# Altium PCB charger.PcbDoc (part 2 of 2)
Units mil, origin at the board's own origin, x right, y up, seen from the top; angles counter-clockwise.
Board outline 4340.74 x 2765.92 mil, 2 copper layers (Top Layer, Bottom Layer); 142 components, 73 nets, 399 pads, 1053 vias.
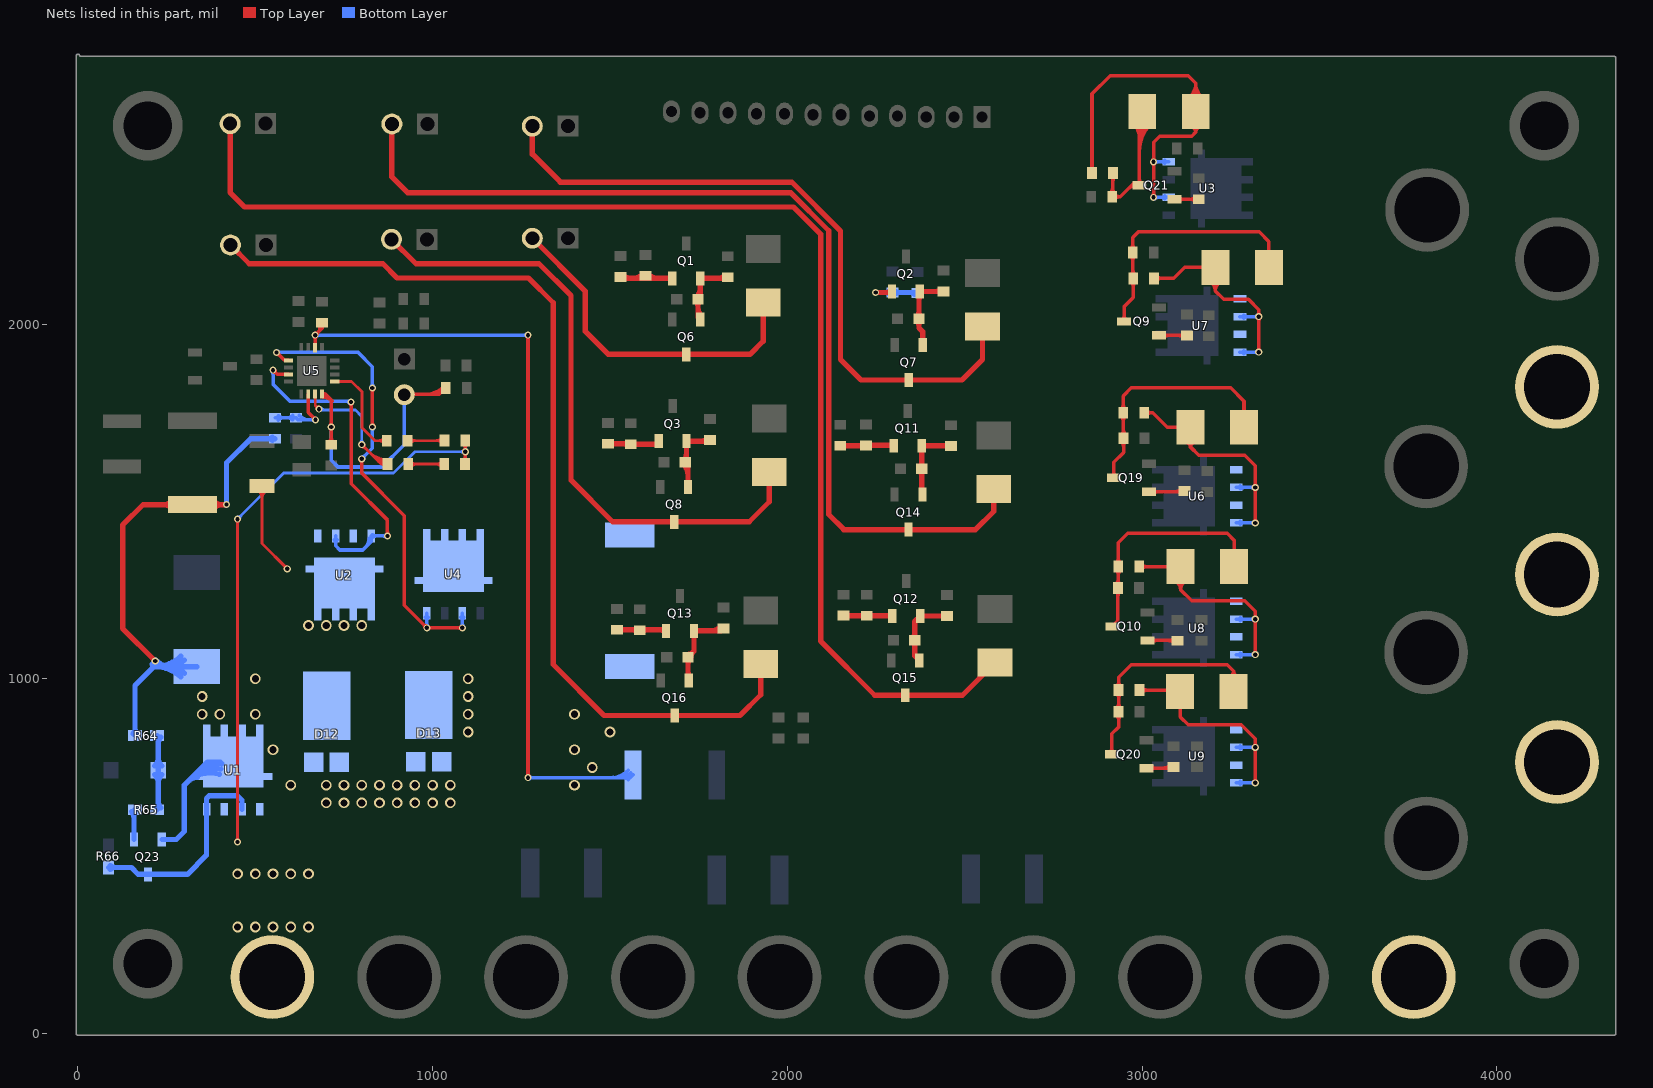
[diagram p2: the nets of this part, all layers, seen from the top]

## Via types
v1: diameter 30, hole 20, Top Layer to Bottom Layer, tented both sides, 995 vias
v2: diameter 20, hole 12, Top Layer to Bottom Layer, tented both sides, 57 vias
v3: diameter 55, hole 40, Top Layer to Bottom Layer, tented both sides, 1 vias

## Nets (pads, with @x,y where several pads share a name; then routed paths per layer and width w, separated by ;. In a path a pad name is that pad's centre, name@x,y a point inside that pad or via, vN(x,y) a via of type N, cw(c..) or ccw(c..) an arc to the next point about the centre after c; other vN are vias at no path point) (continued)
NetC12_2: C12.2 L2.2 R70.1 U5.10 | length 2529.7
  Top Layer w10: v2@665.3,1965.3 cw(c656.77,1956.77) 668.84,1956.77 cw(c680.91,1956.77) v2@672.38,1965.3 ; U5.10@668.84,1933.26 v2(668.84,1968.84) 688,1988 ; v2@668.84,1973.84 ccw(c668.84,1985.91) 677.38,1977.38 ccw(c685.91,1968.84) v2@673.84,1968.84 ; 678.29,1978.29 ccw(c668.28,1988.3) C12.2@678.63,1997.95 ; C12.2@683.31,1996.53 cw(c677.91,1988) 688,1988 ; 685.61,1985.61 ccw(c675.85,1995.36) C12.2@685.94,2004.78 ; C12.2@688,2003.94 688,1988 ; C12.2@692.69,1996.53 ccw(c698.09,1988) 688,1988 ; v2@1265.3,724.7 ccw(c1256.77,733.23) 1268.84,733.23 ccw(c1280.91,733.23) v2@1272.38,724.7 ; v2@1265.3,1965.3 cw(c1256.77,1956.77) 1268.84,1956.77 cw(c1280.91,1956.77) v2@1272.38,1965.3 ; v2(1268.84,721.16) v2(1268.84,1968.84)
  Bottom Layer w10: v2(668.84,1968.84) v2(1268.84,1968.84) ; v2@672.38,1965.3 cw(c680.91,1956.77) 680.91,1968.84 cw(c680.91,1980.91) v2@672.38,1972.38 ; v2@1265.3,1965.3 ccw(c1256.77,1956.77) 1256.77,1968.84 ccw(c1256.77,1980.91) v2@1265.3,1972.38 ; v2(1268.84,721.16) 1557.16,721.16 R70.1@1565,729 ; v2@1272.38,717.62 cw(c1280.91,709.09) 1280.91,721.16 cw(c1280.91,733.23) v2@1272.38,724.7 ; 1501.12,721.16 ccw(c1501.12,792.88) R70.1@1551.83,742.17 ; 1525.26,721.16 ccw(c1525.26,768.74) R70.1@1558.9,735.1 ; 1538.97,721.16 cw(c1538.97,702.97) R70.1@1551.83,715.83
  other v1: 1400,700 1450,750 1400,800 1500,850 1400,900
NetD1_1: cooler1.2 D1.1 Q6.3 | length 976.9
  Top Layer w15: cooler1.2@1281,2242 1430,2093 1430,1980 1495.43,1914.57 Q6.3@1714.63,1914.57 1894.57,1914.57 1932,1952 D1.1@1932,2060.61
NetD2_1: cooler2.2 D2.1 Q7.3 | length 1941.4
  Top Layer w15: cooler2.2@1281,2558 1281,2479 1360,2400 2012.53,2400 2150,2262.53 2150,1900 2207.43,1842.57 Q7.3@2342.63,1842.57 2492.57,1842.57 2550,1900 D2.1@2550,1993.61
NetD3_1: D3.1 P3.2 Q8.3 | length 1846.5
  Top Layer w15: P3.2@884,2239 953,2170 1300,2170 1390,2080 1390,1960 ; 1390,2000 1390,1960 ; D3.1@1949,1582.61 1949,1499 1892.57,1442.57 Q8.3@1680.63,1442.57 1507.43,1442.57 1390,1560 1390,1960
NetD4_1: D4.1 R6.2 U7.2 U7.4 | length 903.8
  Top Layer w10: R6.2@3034.06,2129 3089,2129 3120,2160 D4.1@3206.61,2160 3206.61,2093.39 ; R6.2@3040.26,2122.79 cw(c3055.25,2107.8) 3055.25,2129 cw(c3055.25,2150.2) R6.2@3040.26,2135.21 ; D4.1@3190.68,2119.7 cw(c3176.92,2093.4) 3206.61,2093.4 ; D4.1@3195.31,2128.56 cw(c3185.56,2109.91) 3206.61,2109.91 cw(c3227.65,2109.91) D4.1@3217.9,2128.56 ; D4.1@3222.53,2119.7 ccw(c3236.29,2093.4) 3206.61,2093.4 ; v2@3325.63,1924.37 ccw(c3317.1,1932.9) 3329.17,1932.9 ccw(c3341.24,1932.9) v2@3332.7,1924.37 ; v2@3325.63,2017.3 cw(c3317.1,2008.76) 3329.17,2008.76 cw(c3341.24,2008.76) v2@3332.7,2017.3 ; v2@3325.63,2024.37 ccw(c3317.1,2032.9) 3329.17,2032.9 ccw(c3341.24,2032.9) v2@3332.7,2024.37 ; v2(3329.17,1920.83) v2(3329.17,2020.83) 3329.17,2040.83 3300,2070 3230,2070 3206.61,2093.39
  Bottom Layer w10: U7.4@3276.09,1920.83 v2(3329.17,1920.83) ; U7.2@3276.09,2020.83 v2(3329.17,2020.83) ; U7.4@3287.16,1916.85 cw(c3296.77,1907.24) 3296.77,1920.83 cw(c3296.77,1934.42) U7.4@3287.16,1924.81 ; U7.2@3287.16,2016.85 cw(c3296.77,2007.24) 3296.77,2020.83 cw(c3296.77,2034.42) U7.2@3287.16,2024.81 ; v2@3325.63,1917.3 ccw(c3317.1,1908.76) 3317.1,1920.83 ccw(c3317.1,1932.9) v2@3325.63,1924.37 ; v2@3325.63,2017.3 ccw(c3317.1,2008.76) 3317.1,2020.83 ccw(c3317.1,2032.9) v2@3325.63,2024.37
NetD4_2: D4.2 Q9.3 R4.1 R6.1 | length 880.6
  Top Layer w10: Q9.3@2944.76,2012.19 ccw(c2933.13,2023.81) 2949.57,2023.81 ccw(c2966.02,2023.81) Q9.3@2954.39,2012.19 ; Q9.3@2949.57,2007.37 2949.57,2049.57 2975,2075 R6.1@2975,2129 2974,2130 R4.1@2974,2202 2974,2244 2990,2260 3330,2260 3357.39,2232.61 D4.2@3357.39,2160 ; R4.1@2967.79,2192.84 cw(c2952.8,2177.85) 2974,2177.85 cw(c2995.2,2177.85) R4.1@2980.21,2192.84 ; R4.1@2967.79,2211.16 ccw(c2952.8,2226.15) 2974,2226.15 ccw(c2995.2,2226.15) R4.1@2980.21,2211.16 ; R6.1@2968.79,2119.84 cw(c2953.8,2104.85) 2975,2104.85 cw(c2996.2,2104.85) R6.1@2981.21,2119.84 ; R6.1@2968.79,2138.16 ccw(c2956.22,2150.73) 2974,2150.73 ; 2974,2155.56 ccw(c2998.61,2155.56) R6.1@2981.21,2138.16
NetD5_1: D5.1 R7.2 U8.2 U8.4 | length 875.8
  Top Layer w10: R7.2@2992.06,1316 D5.1@3108.61,1316 3108.61,1251.39 ; R7.2@2998.26,1309.79 cw(c3013.25,1294.8) 3013.25,1316 cw(c3013.25,1337.2) R7.2@2998.26,1322.21 ; D5.1@3093.66,1275.21 cw(c3082.17,1251.4) 3108.61,1251.4 ; D5.1@3123.55,1275.21 ccw(c3135.05,1251.4) 3108.61,1251.4 ; v2@3315.63,1071.56 ccw(c3307.1,1080.1) 3319.17,1080.1 ccw(c3331.24,1080.1) v2@3322.7,1071.56 ; v2@3315.63,1164.49 cw(c3307.1,1155.95) 3319.17,1155.95 cw(c3331.24,1155.95) v2@3322.7,1164.49 ; v2@3315.63,1171.56 ccw(c3307.1,1180.1) 3319.17,1180.1 ccw(c3331.24,1180.1) v2@3322.7,1171.56 ; v2(3319.17,1068.03) v2(3319.17,1168.03) 3319.17,1190.83 3290,1220 3140,1220 3108.61,1251.39
  Bottom Layer w10: U8.4@3266.09,1068.03 v2(3319.17,1068.03) ; U8.2@3266.09,1168.03 v2(3319.17,1168.03) ; U8.4@3277.16,1064.04 cw(c3286.77,1054.43) 3286.77,1068.03 cw(c3286.77,1081.62) U8.4@3277.16,1072.01 ; U8.2@3277.16,1164.04 cw(c3286.77,1154.43) 3286.77,1168.03 cw(c3286.77,1181.62) U8.2@3277.16,1172.01 ; v2@3315.63,1064.49 ccw(c3307.1,1055.95) 3307.1,1068.03 ccw(c3307.1,1080.1) v2@3315.63,1071.56 ; v2@3315.63,1164.49 ccw(c3307.1,1155.95) 3307.1,1168.03 ccw(c3307.1,1180.1) v2@3315.63,1171.56
NetD5_2: D5.2 Q10.3 R5.1 R7.1 | length 821.9
  Top Layer w10: Q10.3@2916.57,1147.37 2932,1162.8 ; Q10.3@2923.96,1154.16 ccw(c2923.35,1162.79) 2932,1162.79 ; R5.1@2925.79,1246.84 cw(c2910.8,1231.85) 2932,1231.85 cw(c2953.2,1231.85) R5.1@2938.21,1246.84 ; R5.1@2925.79,1265.16 ccw(c2908.39,1282.56) 2933,1282.56 ; R7.1@2926.79,1306.84 cw(c2911.8,1291.85) 2933,1291.85 cw(c2954.2,1291.85) R7.1@2939.21,1306.84 ; R7.1@2926.79,1325.16 ccw(c2911.8,1340.15) 2933,1340.15 ccw(c2954.2,1340.15) R7.1@2939.21,1325.16 ; Q10.3@2930.37,1150.74 cw(c2939.1,1155.7) 2932,1162.79 ; 2933,1277.73 ccw(c2950.78,1277.73) R5.1@2938.21,1265.16 ; D5.2@3259.39,1316 3259.39,1390.61 3240,1410 2960,1410 2933,1383 R7.1@2933,1316 2933,1257 R5.1@2932,1256 2932,1162.8
NetD6_1: D6.1 P6.2 Q14.3 | length 2811.4
  Top Layer w15: P6.2@885,2564 885,2415 930,2370 2010,2370 2116.77,2263.23 2116.77,1463.23 2159.43,1420.57 Q14.3@2341.63,1420.57 2530.57,1420.57 2582,1472 D6.1@2582,1535.61
NetD7_1: D7.1 P7.2 Q15.3 | length 3648.4
  Top Layer w15: P7.2@429,2565 429,2371 470,2330 2017.47,2330 2093.77,2253.71 2093.77,1106.23 2246.43,953.57 Q15.3@2332.63,953.57 2493.97,953.57 D7.1@2586,1045.61
NetD8_1: D8.1 P8.2 Q16.3 | length 2782.7
  Top Layer w15: P8.2@430,2223 483,2170 860,2170 900,2130 1270,2130 1340,2060 1340,1980 ; 1340,2010 1340,1980 ; D8.1@1925,1041.61 1925,955 1866.57,896.57 Q16.3@1682.63,896.57 1483.43,896.57 1340,1040 1340,1980
NetD9_1: D9.1 R29.2 U6.2 U6.4 | length 880
  Top Layer w10: R29.2@3006.06,1750 3030,1750 3071,1709 D9.1@3136.61,1709 3136.61,1653.39 ; R29.2@3012.26,1743.79 cw(c3027.25,1728.8) 3027.25,1750 cw(c3027.25,1771.2) R29.2@3012.26,1756.21 ; D9.1@3127.03,1666.15 cw(c3123.33,1653.39) 3136.61,1653.39 ; D9.1@3146.19,1666.15 ccw(c3149.89,1653.39) 3136.61,1653.39 ; v2@3315.63,1442.96 ccw(c3307.1,1451.5) 3319.17,1451.5 ccw(c3331.24,1451.5) v2@3322.7,1442.96 ; v2@3315.63,1535.89 cw(c3307.1,1527.36) 3319.17,1527.36 cw(c3331.24,1527.36) v2@3322.7,1535.89 ; v2@3315.63,1542.96 ccw(c3307.1,1551.5) 3319.17,1551.5 ccw(c3331.24,1551.5) v2@3322.7,1542.96 ; v2(3319.17,1439.43) v2(3319.17,1539.43) 3319.17,1600.83 3290,1630 3160,1630 3136.61,1653.39
  Bottom Layer w10: U6.4@3266.09,1439.43 v2(3319.17,1439.43) ; U6.2@3266.09,1539.43 v2(3319.17,1539.43) ; U6.4@3277.16,1435.45 cw(c3286.77,1425.84) 3286.77,1439.43 cw(c3286.77,1453.02) U6.4@3277.16,1443.41 ; U6.2@3277.16,1535.45 cw(c3286.77,1525.84) 3286.77,1539.43 cw(c3286.77,1553.02) U6.2@3277.16,1543.41 ; v2@3315.63,1435.89 ccw(c3307.1,1427.36) 3307.1,1439.43 ccw(c3307.1,1451.5) v2@3315.63,1442.96 ; v2@3315.63,1535.89 ccw(c3307.1,1527.36) 3307.1,1539.43 ccw(c3307.1,1551.5) v2@3315.63,1542.96
NetD9_2: D9.2 Q19.3 R27.1 R29.1 | length 840.4
  Top Layer w10: Q19.3@2915.76,1571.19 ccw(c2904.13,1582.81) 2920.57,1582.81 ccw(c2937.02,1582.81) Q19.3@2925.39,1571.19 ; Q19.3@2920.57,1566.37 2920.57,1610.57 2948,1638 R27.1@2948,1678 2947,1679 R29.1@2947,1750 2947,1797 2970,1820 3250,1820 3287.39,1782.61 D9.2@3287.39,1709 ; R29.1@2940.79,1740.84 cw(c2925.8,1725.85) 2947,1725.85 cw(c2968.2,1725.85) R29.1@2953.21,1740.84 ; R29.1@2940.79,1759.16 ccw(c2925.8,1774.15) 2947,1774.15 ccw(c2968.2,1774.15) R29.1@2953.21,1759.16 ; R27.1@2941.79,1668.84 cw(c2926.8,1653.85) 2948,1653.85 cw(c2969.2,1653.85) R27.1@2954.21,1668.84 ; R27.1@2941.79,1687.16 ccw(c2929.22,1699.73) 2947,1699.73 ; 2947,1704.56 ccw(c2971.61,1704.56) R27.1@2954.21,1687.16
NetD10_1: D10.1 R30.2 U9.2 U9.4 | length 826
  Top Layer w10: R30.2@2993.06,968 3103.61,968 D10.1@3107.61,964 3107.61,892.39 3130,870 3280,870 3319.17,830.83 v2(3319.17,806.62) v2(3319.17,706.62) ; R30.2@2999.26,961.79 cw(c3014.25,946.8) 3014.25,968 cw(c3014.25,989.2) R30.2@2999.26,974.21 ; v2@3315.63,710.16 ccw(c3307.1,718.69) 3319.17,718.69 ccw(c3331.24,718.69) v2@3322.7,710.16 ; v2@3315.63,803.09 cw(c3307.1,794.55) 3319.17,794.55 cw(c3331.24,794.55) v2@3322.7,803.09 ; v2@3315.63,810.16 ccw(c3307.1,818.69) 3319.17,818.69 ccw(c3331.24,818.69) v2@3322.7,810.16
  Bottom Layer w10: U9.4@3266.09,706.62 v2(3319.17,706.62) ; U9.2@3266.09,806.62 v2(3319.17,806.62) ; U9.4@3277.16,702.64 cw(c3286.77,693.03) 3286.77,706.62 cw(c3286.77,720.21) U9.4@3277.16,710.6 ; U9.2@3277.16,802.64 cw(c3286.77,793.03) 3286.77,806.62 cw(c3286.77,820.21) U9.2@3277.16,810.6 ; v2@3315.63,703.09 ccw(c3307.1,694.55) 3307.1,706.62 ccw(c3307.1,718.69) v2@3315.63,710.16 ; v2@3315.63,803.09 ccw(c3307.1,794.55) 3307.1,806.62 ccw(c3307.1,818.69) v2@3315.63,810.16
NetD10_2: D10.2 Q20.3 R28.1 R30.1 | length 828.1
  Top Layer w10: Q20.3@2909.76,792.19 ccw(c2898.13,803.81) 2914.57,803.81 ccw(c2931.02,803.81) Q20.3@2919.39,792.19 ; Q20.3@2914.57,787.37 2914.57,844.57 2934,864 R28.1@2934,907 R30.1@2934,968 2934,1004 2970,1040 3240,1040 3258.39,1021.61 ; R28.1@2927.79,897.84 cw(c2912.8,882.85) 2934,882.85 cw(c2955.2,882.85) R28.1@2940.21,897.84 ; R28.1@2927.79,916.16 ccw(c2912.8,931.15) 2934,931.15 ccw(c2955.2,931.15) R28.1@2940.21,916.16 ; R30.1@2927.79,958.84 cw(c2912.8,943.85) 2934,943.85 cw(c2955.2,943.85) R30.1@2940.21,958.84 ; R30.1@2927.79,977.16 ccw(c2912.8,992.15) 2934,992.15 ccw(c2955.2,992.15) R30.1@2940.21,977.16 ; D10.2@3247.48,1006.43 ccw(c3242.39,1021.6) 3258.39,1021.6 ; D10.2@3258.39,964 3258.39,1021.61 ; D10.2@3269.31,1006.43 cw(c3274.4,1021.6) 3258.39,1021.6
NetD11_1: D11.1 R36.2 U3.2 U3.4 | length 1432.6
  Top Layer w10: R36.2@2852.74,2435.16 ccw(c2837.75,2450.15) 2858.94,2450.15 ccw(c2880.14,2450.15) R36.2@2865.15,2435.16 ; R36.2@2858.94,2426 2858.94,2648.94 2910,2700 3130,2700 3151.39,2678.61 ; v2@3029.09,2360.91 ccw(c3020.55,2369.45) 3032.62,2369.45 ccw(c3044.69,2369.45) v2@3036.16,2360.91 ; v2@3029.09,2453.84 cw(c3020.55,2445.31) 3032.62,2445.31 cw(c3044.69,2445.31) v2@3036.16,2453.84 ; v2@3029.09,2460.91 ccw(c3020.55,2469.45) 3032.62,2469.45 ccw(c3044.69,2469.45) v2@3036.16,2460.91 ; v2(3032.62,2357.38) v2(3032.62,2457.38) 3032.62,2512.62 3050,2530 3140,2530 3151.39,2541.39 ; D11.1@3130.45,2636.09 ccw(c3097.78,2678.6) 3151.39,2678.6 ; D11.1@3136.54,2628.17 ccw(c3113.38,2658.31) 3151.39,2658.31 ccw(c3189.41,2658.31) D11.1@3166.24,2628.17 ; D11.1@3140.48,2556.57 cw(c3135.39,2541.4) 3151.39,2541.4 ; D11.1@3162.31,2556.57 ccw(c3167.4,2541.4) 3151.39,2541.4 ; D11.1@3172.34,2636.09 cw(c3205,2678.6) 3151.39,2678.6 ; 3151.39,2541.39 D11.1@3151.39,2599 3151.39,2678.61
  Bottom Layer w10: v2(3032.62,2357.38) U3.2@3075.4,2357.38 ; v2(3032.62,2457.38) U3.4@3075.4,2457.38 ; v2@3036.16,2353.84 cw(c3044.69,2345.31) 3044.69,2357.38 cw(c3044.69,2369.45) v2@3036.16,2360.91 ; v2@3036.16,2453.84 cw(c3044.69,2445.31) 3044.69,2457.38 cw(c3044.69,2469.45) v2@3036.16,2460.91 ; U3.2@3064.33,2353.4 ccw(c3054.72,2343.79) 3054.72,2357.38 ccw(c3054.72,2370.97) U3.2@3064.33,2361.36 ; U3.4@3064.33,2453.4 ccw(c3054.72,2443.79) 3054.72,2457.38 ccw(c3054.72,2470.97) U3.4@3064.33,2461.36
NetD11_2: D11.2 Q21.3 R35.1 R36.1 | length 816.6
  Top Layer w10: R35.1@2909.79,2368.16 ccw(c2889.98,2387.98) 2918,2387.98 ; R36.1@2911.79,2416.84 cw(c2896.8,2401.85) 2918,2401.85 cw(c2939.2,2401.85) R36.1@2924.21,2416.84 ; 2918,2378.32 ccw(c2932.37,2378.32) R35.1@2922.21,2368.16 ; R36.1@2918,2426 2918,2361 R35.1@2916,2359 2939,2359 2971.37,2391.37 ; R35.1@2922.21,2352.79 cw(c2937.2,2337.8) 2937.2,2359 cw(c2937.2,2380.2) R35.1@2922.21,2365.21 ; 2964.71,2384.71 cw(c2973.37,2376.04) Q21.3@2980.65,2385.89 ; Q21.3@2972.91,2392.91 cw(c2980.35,2385.48) Q21.3@2986.6,2393.93 ; D11.2@2976.3,2564.85 cw(c2937.02,2525.57) 2992.57,2525.57 ; Q21.3@2979.18,2387.38 ccw(c2971.37,2381.73) 2971.37,2391.37 ; Q21.3@2979.18,2395.36 cw(c2971.37,2401.01) 2971.37,2391.37 ; D11.2@2983.37,2571.93 cw(c2961.16,2549.71) 2992.57,2549.71 ; Q21.3@2987.76,2396.19 ccw(c2976.13,2407.81) 2992.57,2407.81 ccw(c3009.02,2407.81) Q21.3@2997.39,2396.19 ; 2992.57,2486.79 cw(c3102.97,2486.79) D11.2@3024.91,2564.85 ; 2992.57,2510.93 cw(c3078.83,2510.93) D11.2@3017.84,2571.93 ; 2992.57,2535.08 cw(c3054.69,2535.08) D11.2@3010.77,2579 ; D11.2@3000.61,2599 2992.57,2590.97 Q21.3@2992.57,2391.37 2971.37,2391.37
NetD12_3: D12.3 D13.3 R68.1 U2.5 U2.6 U2.7 U2.8 | length 344.6
  Top Layer w8: R68.1@507.91,1531.91 cw(c481.13,1505.13) 519,1505.13 cw(c556.87,1505.13) R68.1@530.09,1531.91 ; R68.1@519,1543 519,1381 v2(590,1310) ; v2@584,1310 ccw(c569.51,1310) 579.76,1320.24 ccw(c590,1330.49) v2@590,1316
  other v1: 1100,850 1100,900 1100,950 1100,1000 650,1150 700,1150 750,1150 800,1150
NetD17_2: D17.2 R64.1 R65.1 | length 356.7
  Bottom Layer w15: D17.2@216.26,730.02 cw(c192.1,705.86) 226.27,705.86 cw(c260.44,705.86) D17.2@236.28,730.02 ; D17.2@216.26,753.98 ccw(c192.1,778.14) 226.27,778.14 ccw(c260.44,778.14) D17.2@236.28,753.98 ; R65.1@222.98,631 226.27,634.28 D17.2@226.27,742 226.27,836.72 R64.1@222.98,840 ; 226.27,653.25 ccw(c250.24,653.25) R65.1@233.29,636.3 ; 226.27,817.75 cw(c250.24,817.75) R64.1@233.29,834.7
NetH1-_1: H1-.1 U7.1 U7.3
NetH2-_1: H2-.1 U6.1 U6.3
NetH3-_1: H3-.1 U8.1 U8.3
NetH4-_1: H4-.1 U9.1 U9.3
NetL2_1: L2.1 U2.1 U2.3 U4.5 U4.6 U4.7 U4.8
NetLED1_1: LED1.1 R75.1 | length 175.2
  Top Layer w8: LED1.1@931.45,1605.22 R75.1@1032.45,1605.22 ; LED1.1@938.36,1598.31 cw(c955.06,1581.61) 955.06,1605.22 cw(c955.06,1628.83) LED1.1@938.36,1612.14 ; R75.1@1025.53,1598.31 ccw(c1008.84,1581.61) 1008.84,1605.22 ccw(c1008.84,1628.83) R75.1@1025.53,1612.14
NetLED1_2: LED1.2 U5.3 | length 585.4
  Top Layer w8: U5.3@668.84,1802.74 668.84,1770.69 v2(679.53,1760) ; v2@673.53,1760 ccw(c659.04,1760) 669.29,1770.24 ccw(c679.53,1780.49) v2@679.53,1766 ; v2@800,1654 cw(c800,1639.51) 810.24,1649.76 cw(c820.49,1660) v2@806,1660 ; v2(800,1660) 854.78,1605.22 ; 820.59,1639.41 ccw(c872.39,1691.22) LED1.2@872.39,1617.95 ; 834.25,1625.75 ccw(c872.39,1663.9) LED1.2@872.39,1609.95 ; 847.9,1612.1 ccw(c872.39,1636.59) LED1.2@872.39,1601.95 ; LED1.2@864.09,1600.05 ccw(c854.78,1594.25) 854.78,1605.22 ; LED1.2@864.09,1610.39 cw(c854.78,1616.19) 854.78,1605.22 ; LED1.2@872.39,1605.22 854.78,1605.22
  Bottom Layer w8: v2(679.53,1760) 681.53,1758 782,1758 800,1740 v2(800,1660) ; v2@683.77,1764.24 ccw(c698.84,1779.31) 698.84,1758 ; v2@795.76,1664.24 ccw(c785.51,1674.49) 800,1674.49 ccw(c814.49,1674.49) v2@804.24,1664.24
NetLED2_1: LED2.1 R77.1 | length 178
  Top Layer w8: LED2.1@929.45,1671.22 1032.22,1671.22 R77.1@1033,1672 ; LED2.1@936.36,1664.31 cw(c953.06,1647.61) 953.06,1671.22 cw(c953.06,1694.83) LED2.1@936.36,1678.14 ; 1007.51,1671.22 ccw(c1007.51,1697.49) R77.1@1026.08,1678.92 ; 1011.27,1671.22 cw(c1011.27,1650.27) R77.1@1026.08,1665.08
NetLED2_2: LED2.2 U5.5 | length 311.7
  Top Layer w8: U5.5@724.26,1838.47 771.53,1838.47 801,1809 801,1707.89 837.67,1671.22 LED2.2@870.39,1671.22 ; LED2.2@863.48,1664.31 ccw(c846.78,1647.61) 846.78,1671.22 ccw(c846.78,1694.83) LED2.2@863.48,1678.14
NetNTC_2: NTC.2 R71.2 R74.1 U5.4 | length 982.2
  Top Layer w10: U5.4@688.53,1794.65 cw(c688.53,1754.04) 717.24,1782.76 ; U5.4@688.53,1802.74 697.26,1802.74 714,1786 v2(714,1710) R74.1@714,1660 ; U5.4@688.53,1804.65 cw(c688.53,1788.18) 700.17,1799.83 ; U5.4@688.88,1794.79 cw(c697.04,1786.22) 705.41,1794.59 ; R74.1@707.79,1666.21 ccw(c692.8,1681.2) 714,1681.2 ccw(c735.2,1681.2) R74.1@720.21,1666.21 ; v2@710.46,1706.46 cw(c701.93,1697.93) 714,1697.93 cw(c726.07,1697.93) v2@717.54,1706.46 ; v2@710.46,1713.54 ccw(c701.93,1722.07) 714,1722.07 ccw(c726.07,1722.07) v2@717.54,1713.54 ; NTC.2@944,1802 1019,1802 R71.2@1037,1820 ; 979.48,1802 ccw(c979.48,1874.57) R71.2@1030.79,1823.26 ; 1003.62,1802 ccw(c1003.62,1850.43) R71.2@1037.86,1816.18
  Bottom Layer w10: v2@710.46,1706.46 cw(c701.93,1697.93) 714,1697.93 cw(c726.07,1697.93) v2@717.54,1706.46 ; v2(714,1710) 714,1616 733,1597 857,1597 920,1660 NTC.2@920,1801
NetQ1_1: Q1.1 R1.1 R8.2 | length 231.5
  Top Layer w15: R8.2@1530,2132.94 1533.94,2129 Q1.1@1676,2129 ; R8.2@1537.39,2137.39 ccw(c1557.64,2157.63) 1557.64,2129 ; 1564.99,2129 ccw(c1564.99,2168.06) R1.1@1592.61,2140.44 ; R1.1@1607.39,2140.44 ccw(c1635.01,2168.06) 1635.01,2129
NetQ1_2: Q1.2 Q6.1 R11.1 TVS1.2 | length 302.7
  Top Layer w15: TVS1.2@1742.7,2064.7 cw(c1729.89,2051.89) 1748,2051.89 cw(c1766.11,2051.89) TVS1.2@1753.3,2064.7 ; TVS1.2@1743.44,2075.3 ccw(c1716.17,2102.57) 1754.74,2102.57 ; 1748,2045.77 ccw(c1778.89,2045.77) Q6.1@1757.05,2023.92 ; Q6.1@1754,2013 1748,2019 TVS1.2@1748,2070 1754.74,2076.74 Q1.2@1754.74,2129 1829,2129 R11.1@1832,2132 ; 1806.64,2129 ccw(c1806.64,2154.4) R11.1@1824.61,2136.44
NetQ2_1: Q2.1 R2.1 R9.2 | length 244.3
  Top Layer w15: v2(2249,2089) 2292,2089 Q2.1@2295,2092 ; 2277.35,2089 ccw(c2277.35,2109.65) Q2.1@2291.95,2095.05
  Bottom Layer w15: v2(2249,2089) R9.2@2296,2089 2365.94,2089 R2.1@2367,2087.94 ; R9.2@2288.61,2084.56 ccw(c2277.89,2073.84) 2277.89,2089 ccw(c2277.89,2104.16) R9.2@2288.61,2093.44 ; R9.2@2303.39,2084.56 cw(c2314.11,2073.84) 2314.11,2089 cw(c2314.11,2104.16) R9.2@2303.39,2093.44 ; 2346.34,2089 cw(c2346.34,2070.24) R2.1@2359.61,2083.5
NetQ2_2: Q2.2 Q7.1 R12.1 TVS2.2 | length 319.2
  Top Layer w15: TVS2.2@2365.7,2009.7 cw(c2352.89,1996.89) 2371,1996.89 cw(c2389.11,1996.89) TVS2.2@2376.3,2009.7 ; TVS2.2@2365.7,2020.3 ccw(c2352.89,2033.11) 2371,2033.11 ccw(c2389.11,2033.11) TVS2.2@2376.3,2020.3 ; 2371,2067.1 cw(c2390.76,2067.1) Q2.2@2376.79,2081.08 ; Q7.1@2382,1941 2382,1978 2371,1989 TVS2.2@2371,2015 2371,2089.26 Q2.2@2373.74,2092 R12.1@2440,2092 ; R12.1@2432.61,2087.56 ccw(c2421.89,2076.84) 2421.89,2092 ccw(c2421.89,2107.16) R12.1@2432.61,2096.44
NetQ3_1: Q3.1 R3.1 R10.2 | length 219.6
  Top Layer w15: R3.1@1494.35,1662.32 1557.29,1662.32 R10.2@1558.35,1661.26 1628.26,1661.26 Q3.1@1637,1670 ; R3.1@1501.74,1657.87 cw(c1512.46,1647.15) 1512.46,1662.32 cw(c1512.46,1677.48) R3.1@1501.74,1666.76 ; 1537.69,1662.32 cw(c1537.69,1643.55) R10.2@1550.95,1656.82 ; R10.2@1565.74,1656.82 cw(c1576.46,1646.1) 1576.46,1661.26 cw(c1576.46,1676.42) R10.2@1565.74,1665.7 ; 1624.5,1661.26 ccw(c1624.5,1674.62) Q3.1@1633.95,1665.17
NetQ3_2: Q3.2 Q8.1 R13.1 TVS3.2 | length 279.4
  Top Layer w15: TVS3.2@1707.44,1604.7 cw(c1677.13,1574.39) 1720,1574.39 ; TVS3.2@1707.44,1615.3 ccw(c1687.42,1635.33) 1715.74,1635.33 ; TVS3.2@1712,1610 TVS3.2@1715.74,1613.74 ; Q8.1@1720,1541 1720,1609.48 TVS3.2@1715.74,1613.74 ; 1756.64,1670 ccw(c1756.64,1695.4) R13.1@1774.61,1677.44 ; R13.1@1782,1673 1779,1670 Q3.2@1715.74,1670 TVS3.2@1715.74,1613.74
NetQ9_1: Q9.1 R14.1 | length 138.1
  Top Layer w10: Q9.1@3048,1968 R14.1@3127,1968 ; Q9.1@3060.69,1963.18 cw(c3072.32,1951.56) 3072.32,1968 cw(c3072.32,1984.44) Q9.1@3060.69,1972.82 ; R14.1@3117.84,1961.79 ccw(c3102.85,1946.8) 3102.85,1968 ccw(c3102.85,1989.2) R14.1@3117.84,1974.21
NetQ10_1: Q10.1 R15.1 | length 144.5
  Top Layer w10: Q10.1@3015,1108 3099,1108 R15.1@3100,1107 ; Q10.1@3027.69,1103.18 cw(c3039.32,1091.56) 3039.32,1108 cw(c3039.32,1124.44) Q10.1@3027.69,1112.82 ; 3073.44,1108 cw(c3073.44,1083.39) R15.1@3090.84,1100.79 ; 3078.27,1108 ccw(c3078.27,1125.78) R15.1@3090.84,1113.21
NetQ11_1: Q11.1 R18.1 R21.2 | length 223.7
  Top Layer w15: R21.2@2149,1656.94 2220.94,1656.94 R18.1@2222,1658 Q11.1@2299,1658 ; R21.2@2156.39,1652.5 cw(c2167.11,1641.78) 2167.11,1656.94 cw(c2167.11,1672.11) R21.2@2156.39,1661.39 ; 2201.34,1656.94 ccw(c2201.34,1675.71) R18.1@2214.61,1662.44 ; R18.1@2229.39,1653.56 cw(c2240.11,1642.84) 2240.11,1658 cw(c2240.11,1673.16) R18.1@2229.39,1662.44 ; 2287.18,1658 cw(c2287.18,1644.18) Q11.1@2296.95,1653.95
NetQ11_2: Q11.2 Q14.1 R24.1 TVS4.2 | length 304.1
  Top Layer w15: TVS4.2@2373.7,1586.7 cw(c2361.52,1574.52) 2378.74,1574.52 ; TVS4.2@2373.7,1597.3 ccw(c2361.52,1609.48) 2378.74,1609.48 ; Q14.1@2378.74,1521.26 Q11.2@2378.74,1657 2460,1657 R24.1@2461,1656 ; 2378.74,1542.74 ccw(c2396.86,1542.74) Q14.1@2384.05,1529.92 ; 2378.74,1573.27 cw(c2397.73,1573.27) TVS4.2@2384.3,1586.7 ; 2378.74,1610.73 ccw(c2397.73,1610.73) TVS4.2@2384.3,1597.3 ; 2440.47,1657 cw(c2440.47,1638.43) R24.1@2453.61,1651.56
NetQ12_1: Q12.1 R19.1 R22.2 | length 220.7
  Top Layer w15: R19.1@2158,1178 2295,1178 Q12.1@2296,1177 ; R19.1@2165.39,1173.56 cw(c2176.11,1162.84) 2176.11,1178 cw(c2176.11,1193.16) R19.1@2165.39,1182.44 ; 2205.75,1178 cw(c2205.75,1162.65) R22.2@2216.61,1173.5 ; 2206.02,1178 ccw(c2206.02,1192.97) R22.2@2216.61,1182.39 ; R22.2@2231.39,1173.5 cw(c2242.25,1162.65) 2242.25,1178 ; R22.2@2231.39,1182.39 ccw(c2241.98,1192.97) 2241.98,1178 ; 2283.18,1178 cw(c2283.18,1164.18) Q12.1@2292.95,1173.95
NetQ12_2: Q12.2 Q15.1 R25.1 TVS5.2 | length 292.9
  Top Layer w15: TVS5.2@2353.7,1103.7 cw(c2340.89,1090.89) 2359,1090.89 cw(c2377.11,1090.89) TVS5.2@2364.3,1103.7 ; TVS5.2@2353.7,1114.3 ccw(c2340.89,1127.11) 2359,1127.11 ccw(c2377.11,1127.11) TVS5.2@2364.3,1114.3 ; Q15.1@2372,1052 2359,1065 TVS5.2@2359,1109 2359,1161.26 Q12.2@2374.74,1177 R25.1@2450,1177 ; R25.1@2442.61,1172.56 ccw(c2431.89,1161.84) 2431.89,1177 ccw(c2431.89,1192.16) R25.1@2442.61,1181.44
NetQ13_1: Q13.1 R20.1 R23.2 | length 208
  Top Layer w15: R23.2@1520,1137.94 1655.06,1137.94 Q13.1@1658,1135 ; R23.2@1527.39,1133.5 cw(c1538.11,1122.78) 1538.11,1137.94 cw(c1538.11,1153.11) R23.2@1527.39,1142.39 ; 1563.61,1137.94 cw(c1563.61,1119.56) R20.1@1576.61,1132.56 ; R20.1@1591.39,1132.56 cw(c1604.39,1119.56) 1604.39,1137.94 ; 1640.48,1137.94 cw(c1640.48,1117.48) Q13.1@1654.95,1131.95
NetQ13_2: Q13.2 Q16.1 R26.1 TVS6.2 | length 335
  Top Layer w15: TVS6.2@1714.7,1055.7 cw(c1701.89,1042.89) 1720,1042.89 cw(c1738.11,1042.89) TVS6.2@1725.3,1055.7 ; 1720,1018.11 ccw(c1737.24,1018.11) Q16.1@1725.05,1005.92 ; TVS6.2@1720.75,1068.5 ccw(c1720.75,1084.8) TVS6.2@1732.27,1073.27 ; Q16.1@1722,995 1720,997 TVS6.2@1720,1061 1736.74,1077.74 Q13.2@1736.74,1135 1813,1135 R26.1@1820,1142 ; TVS6.2@1728.25,1061 cw(c1748.16,1061) TVS6.2@1734.08,1075.08 ; 1784.99,1135 ccw(c1784.99,1174.06) R26.1@1812.61,1146.44
NetQ19_1: Q19.1 R31.1 | length 161
  Top Layer w10: Q19.1@3019,1527 3118,1527 R31.1@3120,1529 ; Q19.1@3031.69,1522.18 cw(c3043.32,1510.56) 3043.32,1527 cw(c3043.32,1543.44) Q19.1@3031.69,1531.82 ; 3091.02,1527 ccw(c3091.02,1555.02) R31.1@3110.84,1535.21 ; 3100.68,1527 cw(c3100.68,1512.63) R31.1@3110.84,1522.79
NetQ20_1: Q20.1 R32.1 | length 136.4
  Top Layer w10: Q20.1@3013,748 3086,748 R32.1@3089,751 ; Q20.1@3025.69,743.18 cw(c3037.32,731.56) 3037.32,748 cw(c3037.32,764.44) Q20.1@3025.69,752.82 ; 3057.61,748 ccw(c3057.61,779.44) R32.1@3079.84,757.21 ; 3072.09,748 cw(c3072.09,737.05) R32.1@3079.84,744.79
NetQ21_1: Q21.1 R37.1 | length 128.1
  Top Layer w10: Q21.1@3091,2352 R37.1@3160,2352 ; Q21.1@3103.69,2347.18 cw(c3115.32,2335.56) 3115.32,2352 cw(c3115.32,2368.44) Q21.1@3103.69,2356.82 ; R37.1@3150.84,2345.79 ccw(c3135.85,2330.8) 3135.85,2352 ccw(c3135.85,2373.2) R37.1@3150.84,2358.21
NetQ23_1: Q23.1 R65.2 | length 104.8
  Bottom Layer w15: R65.2@150.71,625.7 cw(c133.12,608.1) 158,608.1 ; Q23.1@158,547 158,627.98 R65.2@161.02,631
NetQ23_3: Q23.3 R66.1 U1.2 U1.4 | length 628.8
  Bottom Layer w15: R66.1@86,468.02 150.56,468.02 170,448.57 Q23.3@197.37,448.57 308.57,448.57 362.62,502.62 U1.4@362.62,632.4 362.62,662.62 370,670 450,670 462.62,657.38 U1.2@462.62,632.4 ; R66.1@91.3,462.71 cw(c104.11,449.91) 104.11,468.02 cw(c104.11,486.12) R66.1@91.3,473.32
NetR69_2: R69.2 R72.1 U5.2 | length 335.8
  Top Layer w10: U5.2@649.16,1802.74 649.16,1750.84 v2(670,1730) ; v2@665,1730 ccw(c652.93,1730) 661.46,1738.54 ccw(c670,1747.07) v2@670,1735
  Bottom Layer w10: R69.2@555.65,1735.61 R72.1@614.61,1735.61 ; R69.2@564.81,1729.41 cw(c579.8,1714.42) 579.8,1735.61 cw(c579.8,1756.81) R69.2@564.81,1741.82 ; 589.92,1735.61 ccw(c589.92,1758.13) R72.1@605.84,1742.21 ; 591.78,1735.61 cw(c591.78,1715.74) R72.1@605.84,1729.79 ; R72.1@615,1736 R72.1@614.61,1735.61 ; R72.1@624.16,1742.21 ccw(c653.63,1771.68) 653.63,1730 ; v2@666.46,1726.46 ccw(c657.93,1717.93) 657.93,1730 ccw(c657.93,1742.07) v2@666.46,1733.54 ; v2(670,1730) 620.23,1730 R72.1@614.61,1735.61
NetU2_2: U2.2 U2.4 U5.15 | length 1137.2
  Top Layer w10: v2@550,1865 cw(c550,1852.93) 558.54,1861.46 cw(c567.07,1870) v2@555,1870 ; v2(550,1870) 561.84,1858.16 U5.15@593.74,1858.16 ; v2@766.46,1776.46 cw(c757.93,1767.93) 770,1767.93 cw(c782.07,1767.93) v2@773.54,1776.46 ; v2(770,1780) 770,1550 872.6,1447.4 v2(872.6,1402.6) ; v2@869.06,1406.13 ccw(c860.53,1414.67) 872.6,1414.67 ccw(c884.67,1414.67) v2@876.13,1406.13
  Bottom Layer w10: v2@546.46,1866.46 cw(c537.93,1857.93) 550,1857.93 cw(c562.07,1857.93) v2@553.54,1866.46 ; v2(550,1870) 550,1830 597,1783 767,1783 v2(770,1780) ; U2.2@722.4,1391.53 cw(c712.79,1381.92) 726.38,1381.92 cw(c739.97,1381.92) U2.2@730.36,1391.53 ; U2.2@726.38,1402.6 726.38,1374.62 738,1363 803,1363 826.38,1386.38 U2.4@826.38,1402.6 v2(872.6,1402.6) ; 750.69,1783 cw(c750.69,1760.69) v2@766.46,1776.46 ; 810.31,1370.31 ccw(c785.11,1395.51) U2.4@820.75,1395.51 ; U2.4@830.36,1398.62 cw(c839.97,1389.01) 839.97,1402.6 cw(c839.97,1416.19) U2.4@830.36,1406.58 ; v2@869.06,1399.06 ccw(c860.53,1390.53) 860.53,1402.6 ccw(c860.53,1414.67) v2@869.06,1406.13
NetU4_2: U4.2 U4.4 U5.13 | length 1633.2
  Top Layer w10: v2@560,1915 cw(c560,1902.93) 568.54,1911.46 cw(c577.07,1920) v2@565,1920 ; v2(560,1920) 582.47,1897.53 U5.13@593.74,1897.53 ; 578.99,1901.01 ccw(c586.16,1908.19) U5.13@586.16,1898.04 ; v2@796.46,1616.46 cw(c787.93,1607.93) 800,1607.93 cw(c812.07,1607.93) v2@803.54,1616.46 ; v2(800,1620) 800,1580 920,1460 920,1207.24 v2(983.62,1143.62) v2(1083.62,1143.62) ; v2@826.46,1713.54 ccw(c817.93,1722.07) 830,1722.07 ccw(c842.07,1722.07) v2@833.54,1713.54 ; v2@826.46,1816.46 cw(c817.93,1807.93) 830,1807.93 cw(c842.07,1807.93) v2@833.54,1816.46 ; v2(830,1710) v2(830,1820) ; v2@978.62,1143.62 ccw(c966.55,1143.62) 975.09,1152.16 ccw(c983.62,1160.69) v2@983.62,1148.62 ; v2@987.16,1140.09 cw(c995.69,1131.55) 995.69,1143.62 cw(c995.69,1155.69) v2@987.16,1147.16 ; v2@1080.09,1140.09 ccw(c1071.55,1131.55) 1071.55,1143.62 ccw(c1071.55,1155.69) v2@1080.09,1147.16
  Bottom Layer w10: v2(560,1920) 790,1920 830,1880 v2(830,1820) ; v2@563.54,1916.46 cw(c572.07,1907.93) 572.07,1920 cw(c572.07,1932.07) v2@563.54,1923.54 ; v2(800,1620) 830,1650 v2(830,1710) ; v2@800,1625 ccw(c800,1637.07) 808.54,1628.54 ccw(c817.07,1620) v2@805,1620 ; v2@826.46,1706.46 cw(c817.93,1697.93) 830,1697.93 cw(c842.07,1697.93) v2@833.54,1706.46 ; v2@826.46,1823.54 ccw(c817.93,1832.07) 830,1832.07 ccw(c842.07,1832.07) v2@833.54,1823.54 ; U4.4@979.64,1173.33 cw(c970.03,1163.72) 983.62,1163.72 cw(c997.21,1163.72) U4.4@987.6,1173.33 ; v2@980.09,1147.16 ccw(c971.55,1155.69) 983.62,1155.69 ccw(c995.69,1155.69) v2@987.16,1147.16 ; v2(983.62,1143.62) U4.4@983.62,1184.4 ; U4.2@1079.64,1173.33 cw(c1070.03,1163.72) 1083.62,1163.72 cw(c1097.21,1163.72) U4.2@1087.6,1173.33 ; v2@1080.09,1147.16 ccw(c1071.55,1155.69) 1083.62,1155.69 ccw(c1095.69,1155.69) v2@1087.16,1147.16 ; v2(1083.62,1143.62) U4.2@1083.62,1184.4
VIN_Adatper: Adapter.1 R75.2 R77.2 U1.1 U1.3 | length 1907.7
  Top Layer w8: v2@445.76,544.24 ccw(c435.51,554.49) 450,554.49 ccw(c464.49,554.49) v2@454.24,544.24 ; v2@445.76,1445.76 cw(c435.51,1435.51) 450,1435.51 cw(c464.49,1435.51) v2@454.24,1445.76 ; v2(450,540) v2(450,1450) ; R75.2@1084.59,1615.09 ccw(c1066.56,1633.11) v2@1092.06,1633.11 ; R77.2@1085.14,1662.13 cw(c1068.45,1645.44) 1092.06,1645.44 cw(c1115.66,1645.44) R77.2@1098.97,1662.13 ; v2@1087.81,1635.76 cw(c1077.57,1625.51) 1092.06,1625.51 cw(c1106.54,1625.51) v2@1096.3,1635.76 ; v2@1087.81,1644.24 ccw(c1077.57,1654.49) 1092.06,1654.49 ccw(c1106.54,1654.49) v2@1096.3,1644.24 ; R75.2@1092.06,1605.77 v2(1092.06,1640) R77.2@1092.06,1672 ; v2@1092.06,1630.45 ccw(c1113.78,1630.45) R75.2@1098.42,1615.09
  Bottom Layer w8: v2(450,1450) 580,1580 890,1580 950,1640 v2(1092.06,1640) ; v2@450,1456 ccw(c450,1470.49) 460.24,1460.24 ccw(c470.49,1450) v2@456,1450 ; v2@1087.81,1635.76 ccw(c1077.57,1625.51) 1077.57,1640 ccw(c1077.57,1654.49) v2@1087.81,1644.24
  other v1: 450,300 500,300 550,300 600,300 650,300 450,450 500,450 550,450 600,450 650,450
VIN_Adatper_OUT: D12.1 D12.2 D13.1 D13.2 D16.2 Q23.2 R64.2 R67.1 R69.1 U1.5 U1.6 U1.7 U1.8 | length 2494.4
  Top Layer w15: v2(218,1050) 126,1142 126,1433 184,1491 R67.1@323,1491 v2(419,1491) ; R67.1@266.32,1479.6 ccw(c238.8,1452.08) 238.8,1491 ccw(c238.8,1529.92) R67.1@266.32,1502.4 ; R67.1@379.68,1479.6 cw(c407.2,1452.08) 407.2,1491 cw(c407.2,1529.92) R67.1@379.68,1502.4
  Bottom Layer w15: R64.2@155.71,845.3 ccw(c142.91,858.11) 161.02,858.11 ccw(c179.12,858.11) R64.2@166.32,845.3 ; R64.2@161.02,840 161.02,981.02 214.25,1034.25 D16.2@335,1034.25 ; 205.25,1025.25 ccw(c180.49,1050) v2@215.5,1050 ; 209.16,1041.16 ccw(c225.84,1057.84) 225.84,1034.25 ; v2@219.77,1051.77 ccw(c262.05,1094.05) 262.05,1034.25 ; Q23.2@236.74,547 247,547 277,547 300,570 300,600 300,700 365.28,765.28 U1.5@401.41,765.28 ; D16.2@289.76,1004.76 ccw(c218.55,933.55) 218.55,1034.25 ccw(c218.55,1134.95) D16.2@289.76,1063.75 ; D16.2@300.36,1015.36 ccw(c254.76,969.76) 254.76,1034.25 ccw(c254.76,1098.74) D16.2@300.36,1053.14 ; 306.99,706.99 cw(c373.41,640.57) U1.5@398.31,731.15 ; 312.22,712.22 cw(c337.23,687.21) U1.5@337.23,722.58 ; 325.23,725.23 cw(c381.28,669.18) U1.5@402.28,745.61 ; 343.46,743.46 cw(c389.14,697.79) U1.5@406.26,760.07 ; v2(419,1491) 419,1609 486.56,1676.56 R69.1@555.65,1676.56 ; R69.1@548.26,1672.12 ccw(c537.54,1661.4) 537.54,1676.56 ccw(c537.54,1691.72) R69.1@548.26,1681
  other v1: 700,650 750,650 800,650 850,650 900,650 950,650 1000,650 1050,650 1050,650 600,700 700,700 750,700 800,700 850,700 900,700 950,700 1000,700 1050,700 550,800 350,900 400,900 500,900 350,950 500,1000
pads on no net: P11.12 R64.0 R65.0 R66.0

## Polygon pours and split planes (outlines as drawn)
GND on Bottom Layer "L1_TOP-No Net" (solid, remove dead copper, pour order 6): -311,3210 -268,3167 4517,3167 4517,-107 4220,-404 4054,-238 -241,-238 -241,3201 -294,3254
NetH2-_1 on Bottom Layer "L1_TOP-No Net" (solid, remove dead copper, pour order 9): 3250,1620 3470,1620 3520,1570 3640,1450 3880,1450 4370,1450 4390,1470 4390,1140 4390,1020 4380,1010 4150,1010 4090,1010 4030,1070 3880,1220 3760,1220 3410,1220 3240,1390 3240,1610 3250,1620
NetH1-_1 on Bottom Layer "L1_TOP-No Net" (solid, remove dead copper, pour order 8): 3250,2100 3810,2100 3870,2100 3920,2050 3960,2010 4170,2010 4410,2010 4450,1970 4450,1590 4060,1590 4040,1610 3790,1860 3370,1860 3270,1860 3250,1880 3250,2100
NetH3-_1 on Bottom Layer "L1_TOP-No Net" (solid, remove dead copper, pour order 7): 3240,1240 3350,1240 3380,1210 3430,1160 3580,1160 3590,1160 3630,1120 3660,1090 3660,980 3690,950 3720,920 4070,920 4440,920 4470,890 4470,450 4050,450 4020,480 4000,500 4000,630 3970,660 3930,700 3820,700 3610,700 3570,740 3550,760 3550,810 3550,880 3530,900 3470,960 3360,960 3270,960 3240,990 3240,1240
NetH4-_1 on Bottom Layer "L1_TOP-No Net" (solid, remove dead copper, pour order 5): 3250,910 3450,910 3480,880 3520,840 3520,800 3520,750 3620,650 3630,640 3630,480 3630,460 3690,400 3700,390 3890,390 3900,390 3960,330 3970,320 3970,-90 3630,-90 3620,-80 3590,-50 3590,180 3590,290 3560,320 3540,340 3440,340 3310,340 3270,380 3230,420 3230,900 3240,900 3250,910
GND on Top Layer "L1_TOP-No Net" (solid, remove dead copper, pour order 10): -555,2913 5115,2913 4963,2761 4963,-345 -56,-345 -368,-33 -535,134 -535,2885

## Keep-outs
Keep-Out Layer:
  lines w10: 10,10 4320,10 4320,2740 10,2740 10,10

## Other copper
Top Layer:
  rectangle net BAT_CHARGE: 1140,50 1420,510
  rectangle net BAT_CHARGE: 1810,30 2130,460
  rectangle net BAT_CHARGE: 2570,24 2840,420
  rectangle net BAT_CHARGE: 1140,320 3610,660
  rectangle net BAT_CHARGE: 3200,25 3600,660
  rectangle net BAT_CHARGE: 3520,320 4000,1990
  rectangle net AIR_12V: 3484,2198 3951,2676
  rectangle net AIR_12V: 3290,2301 3521,2679
  rectangle net NetD12_3: 575,932 862,1234
  rectangle net NetD12_3: 576,834 1128,1051
  rectangle net VIN_Adatper_OUT: 669,580 1105,775
  rectangle net VIN_Adatper_OUT: 321,712 432,1084
  rectangle: 983,1246 1137,1553
  rectangle net GND: 832.5,133 972,380
  rectangle net GND: 714,125 1065,220
  rectangle net GND: 4117.5,2035 4210,2360
  rectangle net GND: 3993,2147 4214,2225
  rectangle net GND: 2182.5,122 2501,200
  rectangle net GND: 2279,142 2423,299
  rectangle net GND: 2885,119 3102,201
  rectangle net GND: 3011,176 3108,302
  rectangle net GND: 1472,119 1770,214
  rectangle net GND: 1579,101 1683,296
Bottom Layer:
  rectangle net VIN_Adatper: 400,570 430,650
  rectangle net VIN_Adatper: 500,570 530,650
  rectangle net NetL2_1: 660,1380 690,1460
  rectangle net NetL2_1: 760,1380 790,1460
  rectangle net NetC12_2: 1330,630 1650,1100
  rectangle net BAT_CHARGE_O: 1710,350 1870,840
  rectangle net BAT_CHARGE_O: 1390,350 1770,530
  rectangle net BAT_CHARGE_O: 1710,760 2560,840
  rectangle net BAT_CHARGE_O: 2460,360 2560,840
  rectangle net AIR_12V: 3290,2200 3940,2690
  rectangle net BAT_CHARGE: 2950,2390 3100,2420
  rectangle net BAT_CHARGE: 2950,2290 3100,2330
  rectangle net BAT_CHARGE: 2630,320 2950,2420
  rectangle net GND: 842,133 972,373
  rectangle net GND: 727,112 1077,229
  rectangle net GND: 1575,75 1663,317
  rectangle net GND: 1447,110 1777.5,204
  rectangle net GND: 2307,44 2375,301
  rectangle net GND: 2156,122 2501,221
  rectangle net GND: 3020,80 3098,364
  rectangle net GND: 2874,109 3237,226
  rectangle net NetH1-_1: 3992,1783.91 4306.75,1877
  rectangle net NetH1-_1: 4142,1648 4234,1990
  rectangle net NetH2-_1: 4108,1105 4242,1437
  rectangle net NetH2-_1: 3984,1254.91 4306.75,1349
  rectangle net NetH3-_1: 4128,560 4229,912
  rectangle net NetH3-_1: 3988,717.25 4299.61,821
  rectangle net GND: 4127,2039 4193,2338
  rectangle net GND: 4005,2151 4244,2225
  region net VIN_Adatper: 400,590 540,590 680,450 680,80 630,30 440,30 400,70
  region net VIN_Adatper_OUT: 530,880 610,800 1080,800 1130,750 1130,590 1100,560 690,560 560,690 350,690 320,720 320,870 330,880
  region net NetD12_3: 850,1350 870,1330 870,1150 940,1080 1130,1080 1170,1040 1170,850 1140,820 620,820 570,870 570,1320 600,1350
  region net NetL2_1: 660,1450 660,1530 690,1560 1750,1560 1750,1240 950,1240 930,1260 930,1400 890,1440 670,1440
  region net VIN_Adatper_OUT: 207.05,1100 480,1100 540,1040 540,860 520,840 378.14,840 298.14,920 210,920 190,940 190,1082.95
  region net BAT_CHARGE: 1930,520 1930,350 1850,270 1850,80 1900,30 2060,30 2110,80 2110,270 2020,360 2020,510 2010,520
  region net BAT_CHARGE: 2640,520 2640,350 2560,270 2560,80 2610,30 2770,30 2820,80 2820,270 2730,360 2730,510 2720,520
  region net BAT_CHARGE: 1220,530 1220,360 1140,280 1140,90 1190,40 1350,40 1400,90 1400,280 1310,370 1310,520 1300,530

## Silkscreen, mask and mechanical layers (free items; w line width, h text height)
Top Solder:
  rectangle: 2686,359 2830,2125
  rectangle: 1165,340 3531,643
  rectangle: 3524,342 3655,1981
  rectangle: 3301,2470 3950,2659
  rectangle: 3301,2307 3499,2659
  rectangle: 704,599 1067,755
  rectangle: 336,736 409,1058
  rectangle: 594,854 846,1204
  rectangle: 764,849 1050,1030
  rectangle: 994,1260 1113,1541
Mechanical 1:
  lines w10: 0,2750 4330.71,2750 4330.71,0 0,0 0,2755.91

## Dimensions
4330.71,2750 to 4330.71,0 on Mechanical 1
0,0 to 4330.71,0 on Mechanical 1